# Altium PCB CY8C6347BZI-BLD54 PCB File.PcbDoc
Units mil, origin at the board's own origin, x right, y up, seen from the top; angles counter-clockwise.
Board outline 6000 x 4000 mil, 2 copper layers (Top Layer, Bottom Layer); 29 components, 27 nets, 191 pads, 0 vias.
Unrouted connection lines stored in the file: 82.
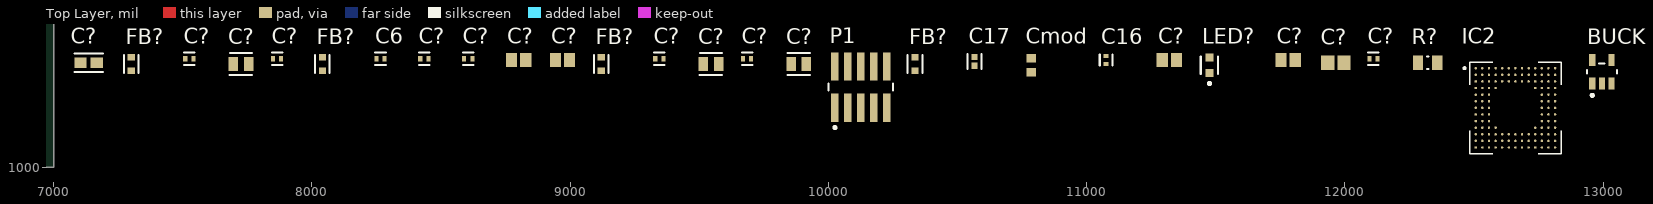
[diagram p0: Top Layer view]
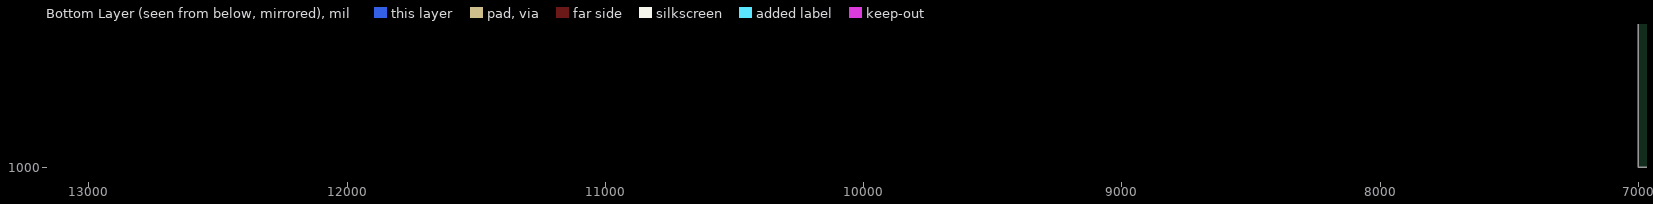
[diagram p1: Bottom Layer view, seen from below]

## Layer stack, top to bottom
Top Solder: solder mask 0.4, Solder Resist, Dk 3.5
Top Layer: signal copper 1.4
Dielectric 1: dielectric 12.6, FR-4, Dk 4.8
Bottom Layer: signal copper 1.4
Bottom Solder: solder mask 0.4, Solder Resist, Dk 3.5

## Board outline
1000,1000 7000,1000 7000,5000 1000,5000

## Design rules (kind name [scope] priority, off if disabled: settings)
Clearance [All] p1: gap=10 ignorepadtopadclearanceinfootprint=FALSE except(0: Arc-Hole Track-Hole SMDPad-Hole THPad-Hole Via-Hole Fill-Hole Poly-Hole Region-Hole Text-Hole)
PolygonConnect [All] p1: connectstyle=Relief reliefconductorwidth=10 reliefentries=4 polygonreliefangle="90 Angle" airgapwidth=10
RoomDefinition "PSoC6 Cardiac Arrest Schematic" [InComponentClass('PSoC6 Cardiac Arrest Schematic')] p1: confinementstyle=ConfineIn formatcopy=TRUE lockcomponents=FALSE outline 7050,1005 13235,1005 13235,1555 7050,1555
RoutingVias [All] p1: holewidth=28 width=50 viastyle="Through Hole" minholewidth=28 minwidth=50 maxholewidth=28 maxwidth=50
SolderMaskExpansion [All] p1: expansion=4 istentingtop=FALSE
Width [All] p1: maxlimit=10 minlimit=10 preferedwidth=10
30 further rules are at their usual default settings.

## Classes and differential pairs
component class "PSoC6 Cardiac Arrest Schematic": BUCK? C6 C16 C17 C? CinA CinB Cmod FB? IC2 L1 LED? P1 R? USB?

## Components (designator, comment, footprint, x,y, rotation, side; value= is the part's Value field where it differs from the comment)
BUCK? "LD3985M33R" FP-SOT23-5L-7049676-MFG 12995,1370 r90 top
C6 "GRM155R71C104KA88D" FP-GRM15-MFG 8265,1420 r0 top value=0.10μF
C16 "GRM155R71C104KA88D" FP-GRM15-MFG 11075,1415 r90 top value=0.10μF
C17 "GRM155R60J475ME47D" FP-GRM155-0_1-IPC_B 10565,1410 r90 top
C? "GRM155R71C104KA88D" FP-GRM15-MFG 12110,1420 r0 top value=0.10μF
C? "GRM188R60J106ME47D" FP-GRM188-0_1-e0_2_0_55-IPC_A 7135,1405 r0 top
C? "C0805C106K8PACTU" FP-C0805C-DG-MFG 7725,1400 r0 top value=10uF
C? "GRM155R71C104KA88D" FP-GRM15-MFG 7525,1420 r0 top value=0.10μF
C? "GRM155R71C104KA88D" FP-GRM15-MFG 9345,1420 r0 top value=0.10μF
C? "C0805C105K4PACTU" CAPC2013X145X50LL20T25 8970,1415 r0 top
C? "GRM155R71C104KA88D" FP-GRM15-MFG 8435,1420 r0 top value=0.10μF
C? "08052C103KAT2A" CAPC2013X140X50NL20T25 11965,1405 r0 top
C? "GRM155R71C104KA88D" FP-GRM15-MFG 8605,1420 r0 top value=0.10μF
C? "C0805C105K4PACTU" CAPC2013X145X50LL20T25 11320,1415 r0 top
C? "" FP-C0805C-DG-MFG 9545,1400 r0 top value=10uF
C? "" FP-C0805C-DG-MFG 9885,1400 r0 top value=10uF
C? "GRM155R71C104KA88D" FP-GRM15-MFG 7865,1420 r0 top value=0.10μF
C? "C0805C105K4PACTU" CAPC2013X145X50LL20T25 11780,1415 r0 top
C? "" FP-GRM15-MFG 9685,1420 r0 top value=0.10μF
C? "C0805C105K4PACTU" CAPC2013X145X50LL20T25 8800,1415 r0 top
Cmod "GRM188R71H222KA01D" CAPC1608X90X35NL10T15 10785,1395 r90 top
FB? "BLM18HE102SN1D" FP-BLM18-0_15-t0_8-MFG 7300,1400 r90 top
FB? "BLM18HE102SN1D" FP-BLM18-0_15-t0_8-MFG 8040,1400 r90 top
FB? "BLM18HE102SN1D" FP-BLM18-0_15-t0_8-MFG 10335,1400 r90 top
FB? "BLM18HE102SN1D" FP-BLM18-0_15-t0_8-MFG 9120,1400 r90 top
IC2 "CY8C6347BZI-BLD54" BGAS124C65P13X13_900X900X100 12660,1230 r0 top
LED? "LTST-C190GKT" FP-LTST-C190GKT-MFG 11475,1395 r90 top
P1 "FTSH-105-01-F-DV-K" SMTC-FTSH-105-01-L-DV-K_V 10125,1310 r0 top
R? "CRCW08052K00FKEA" FP-CRCW0805-e3-IPC_B 12320,1405 r0 top

## Footprints (in the part's own frame and the unit in brackets; to place one, negate y for a bottom-side part, rotate by r counter-clockwise, add the part's x,y. Pads: shape width x height; smd on the part's side, far side on the other; paste and mask are expansions set on the pad)
BGAS124C65P13X13_900X900X100 [mm]
  round 0.24 smd: A1(-3.9,3.9) A2(-3.25,3.9) A3(-2.6,3.9) A4(-1.95,3.9) A5(-1.3,3.9) A6(-0.65,3.9) A7(0,3.9) A8(0.65,3.9) A9(1.3,3.9) A10(1.95,3.9) A11(2.6,3.9) A12(3.25,3.9) A13(3.9,3.9) B1(-3.9,3.25) B2(-3.25,3.25) B3(-2.6,3.25) B4(-1.95,3.25) B5(-1.3,3.25) B6(-0.65,3.25) B7(0,3.25) B8(0.65,3.25) B9(1.3,3.25) B10(1.95,3.25) B11(2.6,3.25) B12(3.25,3.25) B13(3.9,3.25) C1(-3.9,2.6) C2(-3.25,2.6) C3(-2.6,2.6) C4(-1.95,2.6) C5(-1.3,2.6) C6(-0.65,2.6) C7(0,2.6) C8(0.65,2.6) C9(1.3,2.6) C10(1.95,2.6) C11(2.6,2.6) C12(3.25,2.6) C13(3.9,2.6) D1(-3.9,1.95) D2(-3.25,1.95) D3(-2.6,1.95) D4(-1.95,1.95) D10(1.95,1.95) D11(2.6,1.95) D12(3.25,1.95) D13(3.9,1.95) E1(-3.9,1.3) E2(-3.25,1.3) E3(-2.6,1.3) E11(2.6,1.3) E12(3.25,1.3) E13(3.9,1.3) F1(-3.9,0.65) F2(-3.25,0.65) F3(-2.6,0.65) F11(2.6,0.65) F12(3.25,0.65) F13(3.9,0.65) G1(-3.9,0) G2(-3.25,0) G3(-2.6,0) G11(2.6,0) G12(3.25,0) G13(3.9,0) H1(-3.9,-0.65) H2(-3.25,-0.65) H3(-2.6,-0.65) H11(2.6,-0.65) H12(3.25,-0.65) H13(3.9,-0.65) J1(-3.9,-1.3) J2(-3.25,-1.3) J3(-2.6,-1.3) J11(2.6,-1.3) J12(3.25,-1.3) J13(3.9,-1.3) K1(-3.9,-1.95) K2(-3.25,-1.95) K3(-2.6,-1.95) K4(-1.95,-1.95) K10(1.95,-1.95) K11(2.6,-1.95) K12(3.25,-1.95) K13(3.9,-1.95) L1(-3.9,-2.6) L2(-3.25,-2.6) L3(-2.6,-2.6) L4(-1.95,-2.6) L5(-1.3,-2.6) L6(-0.65,-2.6) L7(0,-2.6) L8(0.65,-2.6) L9(1.3,-2.6) L10(1.95,-2.6) L11(2.6,-2.6) L12(3.25,-2.6) L13(3.9,-2.6) M1(-3.9,-3.25) M2(-3.25,-3.25) M3(-2.6,-3.25) M4(-1.95,-3.25) M5(-1.3,-3.25) M6(-0.65,-3.25) M7(0,-3.25) M8(0.65,-3.25) M9(1.3,-3.25) M10(1.95,-3.25) M11(2.6,-3.25) M12(3.25,-3.25) M13(3.9,-3.25) N1(-3.9,-3.9) N2(-3.25,-3.9) N3(-2.6,-3.9) N4(-1.95,-3.9) N5(-1.3,-3.9) N6(-0.65,-3.9) N7(0,-3.9) N8(0.65,-3.9) N9(1.3,-3.9) N10(1.95,-3.9) N11(2.6,-3.9) N12(3.25,-3.9) N13(3.9,-3.9)
  silkscreen extent -5.1,-4.5 4.5,4.5
CAPC1608X90X35NL10T15 [mm] "Chip Capacitor, 2-Leads, Body 1.7x0.9mm, IPC Medium Density"
  rect 0.85x0.95 smd: 1(-0.675,0) 2(0.675,0)
  body extent -0.85,-0.45 0.85,0.45, height 0.9
CAPC2013X140X50NL20T25 [mm] "Chip Capacitor, 2-Leads, Body 2.00x1.25mm, IPC Medium Density"
  rect 1.3x1.45 smd: 1(-0.8,0) 2(0.8,0)
  body extent -1.1,-0.72 1.1,0.72, height 1.4
CAPC2013X145X50LL20T25 [mm] "Chip Capacitor, 2-Leads, Body 2.00x1.25mm, IPC High Density"
  rect 1.1x1.35 smd: 1(-0.7,0) 2(0.7,0)
  body extent -1.1,-0.72 1.1,0.72, height 1.45
FP-BLM18-0_15-t0_8-MFG [mm]
  rect 0.65x0.7 smd paste+0 mask+0: 1(-0.675,0) 2(0.675,0)
  silkscreen extent -0.87,-0.72 0.87,0.72, body extent -1.1,-0.58 1.1,0.58, height 0.25
FP-C0805C-DG-MFG [mm]
  rect 0.95x1.35 smd paste+0 mask+0: 1(-0.75,0) 2(0.75,0)
  silkscreen extent -1.11,-1.08 1.1,1.07, body extent -1.4,-0.85 1.4,0.85, height 0.25
FP-CRCW0805-e3-IPC_B [mil]
  rect 39.63x55.44 smd paste+0 mask+0: 1(-37.44,0) 2(37.44,0)
  silkscreen extent -3,-25 3,25, body extent -67,-38 67,38, height 10
FP-GRM15-MFG [mm]
  rect 0.4x0.5 smd paste+0 mask+0: 1(-0.4,0) 2(0.4,0)
  silkscreen extent -0.53,-0.63 0.53,0.63, body extent -0.7,-0.38 0.7,0.38, height 0.25
FP-GRM155-0_1-IPC_B [mil]
  rect 24.23x22.54 smd paste+0 mask+0: 1(-16.87,0) 2(16.87,0)
  silkscreen extent -29,-27 29,27, body extent -35,-17 35,17, height 10
FP-GRM188-0_1-e0_2_0_55-IPC_A [mil]
  rect 47.57x39.85 smd paste+0 mask+0: 1(-31.57,0) 2(31.57,0)
  silkscreen extent -55,-36 55,36, body extent -75,-40 75,40, height 10
FP-LTST-C190GKT-MFG [mm]
  rect 0.8x0.8 smd paste+0 mask+0: 1(-0.75,0) 2(0.75,0)
  silkscreen extent -1.92,-0.85 0.85,0.85, body extent -1.25,-0.55 1.25,0.55, height 0.25
FP-SOT23-5L-7049676-MFG [mm]
  rect 1.2x0.6 smd paste+0 mask+0: 1(-1.15,0.95) 2(-1.15,0) 3(-1.15,-0.95) 4(1.15,-0.95) 5(1.15,0.95)
  silkscreen extent -2.45,-1.48 0.8,1.47, body extent -1.85,-1.58 1.85,1.57, height 0.25
SMTC-FTSH-105-01-L-DV-K_V [mm] "CONN, 10-Leads, Body 6.35x3.43mm, Pitch 1.27mm"
  rect 0.74x2.79 smd: 1(-2.54,-2.035) 2(-2.54,2.035) 3(-1.27,-2.035) 4(-1.27,2.035) 5(0,-2.035) 6(0,2.035) 7(1.27,-2.035) 8(1.27,2.035) 9(2.54,-2.035) 10(2.54,2.035)
  silkscreen extent -3.17,-4.1 3.17,0.34, body extent -3.17,-2.92 3.18,2.92, height 6.12

## Part data
BUCK?: library part CMP-0244-00328-2, "IC REG LINEAR 3.3V 150MA SOT23-5", Case/Package=SOT-23, Dropout Voltage=60mV, Input Bias Current=85uA, Max Input Voltage=6V, Max Operating Temperature=125°C, Max Output Current=150mA, Min Current Limit=300mA, Min Input Voltage=2.5V, Min Operating Temperature=-40°C, Min Output Voltage=3.3V, Output Voltage Accuracy=2%, Package Quantity=1, Quiescent Current=150uA, Accuracy=2%, Height=1.3mm, Lead Free="Lead Free", Length=3mm, Mount="Surface Mount", Number of Outputs=1, Number of Pins=5, Number of Regulators=1, Output Current=150mA, Output Type=Fixed, Output Voltage=3.3V, Packaging="Tape and Reel", Polarity=Positive, Radiation Hardening=No, Width=1.75mm
C6 C16 C? C? C? C? C? C?: library part CMP-2100-03641-2, "CAP CER 0.1UF 16V X7R 0402", Capacitance=0.10μF, Manufacturer=Murata, Package=GRM15, Temperature="-55°C to +125°C", Temperature Characteristic=X7R, Temperature Range High=+125°C, Temperature Range Low=-55°C, Tolerance=10%, Voltage Rating=16Vdc, Category=Cap, ComponentLink2Description=Datasheet, ComponentLink2URL=https://search.murata.co.jp/Ceramy/image/img/A01X/G101/ENG/GRM155R71H471KA01-01A.pdf, Device Class L1="Passive Components", Device Class L2=Capacitors, Device Class L3="Ceramic Capacitors", Digikey Description="CAP CER 0.1UF 16V X7R 0402", Height=0.55mm, Ipc Land Pattern Name=CAPC10050X219, Lead Free=yes, Manufacturer Part Number=GRM155R71C104KA88D, Material=Ceramic, Mouser Description="0402 0.1 uF 16V ±10 % Tolerance X7R SMT Multilayer Ceramic Capacitor", Octopart=https://octopart.com/grm155r71c104ka88d-murata-196880, RoHS=TRUE, Standoff Height=0mm
C17: library part CMP-2008-04549-2, "Chip Multilayer Ceramic Capacitors for General Purpose, 0402, 4.7uF, X5R, 15%, 20%, 6.3V", Capacitance=4.7uF, Case Code (Imperial)=0402, Case Code (Metric)=1005, Dielectric=X5R, Max Operating Temperature=85°C, Min Operating Temperature=-55°C, Package Quantity=10000, Tolerance=20%, Voltage=6.3V, Case/Package=0402, Contact Plating=Tin, Depth=0.5mm, Height=0.5mm, Lead Free="Lead Free", Length=1mm, Mount="Surface Mount", Packaging="Tape and Reel", REACH SVHC="No SVHC", Termination=SMD/SMT, Thickness=0.022inch, Voltage Rating=6.3V, Voltage Rating (DC)=6.3V, Weight=0.000212oz, Width=0.02inch
C?: library part CMP-2006-02792-2, "Chip Multilayer Ceramic Capacitors for General Purpose, 0603, 10uF, X5R, 15%, 20%, 6.3V", Capacitance=10uF, Case Code (Imperial)=0603, Case Code (Metric)=1608, Dielectric=X5R, Max Operating Temperature=85°C, Min Operating Temperature=-55°C, Package Quantity=4000, Tolerance=20%, Voltage=6.3V, Case/Package=0603, Depth=0.8mm, Height=0.8mm, Lead Free="Lead Free", Length=1.6mm, Material=Ceramic, Mount="Surface Mount", Packaging="Tape and Reel", Radiation Hardening=No, REACH SVHC="No SVHC", Termination=SMD/SMT, Thickness=0.035inch, Voltage Rating=6.3V, Voltage Rating (DC)=6.3V, Width=0.031inch
C?: library part CMP-2007-03243-2, "CAP CER 10UF 10V X5R 0805", 3DS Part Number=220-00001, Capacitance=10uF, Manufacturer=Kemet, Package=C0805C-DG, Temperature="-55°C to +85°C", Temperature Characteristic=X5R, Temperature Coefficient=15%, Temperature Range High=+85°C, Temperature Range Low=-55°C, Tolerance=10%, Voltage=10V, Automotive=No, Category=Cap, ComponentLink2Description=Datasheet, ComponentLink2URL=https://content.kemet.com/datasheets/KEM_C1006_X5R_SMD.pdf, Device Class L1="Passive Components", Device Class L2=Capacitors, Device Class L3="Ceramic Capacitors", Digikey Description="CAP CER 10UF 10V X5R 0805", Height=1.4mm, Ipc Land Pattern Name=CAPC200125X125, Lead Free=Yes, Manufacturer Part Number=C0805C106K8PACTU, Material=Ceramic, Mouser Description="CAP CER 10UF 10V X5R 0805", Octopart=https://octopart.com/c0805c106k8pactu-kemet-98697, RoHS=TRUE, Voltage Rating=10V
C? C? C? C?: library part CMP-1036-04746-2, Manufacturer=Kemet, Part Number=C0805C105K4PACTU
C?: library part CMP-2007-04596-1, Manufacturer="AVX Interconnect / Elco", Part Number=08052C103KAT2A
C? C?: library part CMP-2007-03243-2, "CAP CER 10UF 10V X5R 0805", 3DS Part Number=220-00001, Capacitance=10uF, Manufacturer=Kemet, Manufacturer Part Number=C0805C106K8PACTU, Package=C0805C-DG, Temperature="-55°C to +85°C", Temperature Characteristic=X5R, Temperature Coefficient=15%, Temperature Range High=+85°C, Temperature Range Low=-55°C, Tolerance=10%, Voltage=10V, Automotive=No, Category=Cap, ComponentLink2Description=Datasheet, ComponentLink2URL=https://content.kemet.com/datasheets/KEM_C1006_X5R_SMD.pdf, Device Class L1="Passive Components", Device Class L2=Capacitors, Device Class L3="Ceramic Capacitors", Digikey Description="CAP CER 10UF 10V X5R 0805", Height=1.4mm, Ipc Land Pattern Name=CAPC200125X125, Lead Free=Yes, Material=Ceramic, Mouser Description="CAP CER 10UF 10V X5R 0805", Octopart=https://octopart.com/c0805c106k8pactu-kemet-98697, RoHS=TRUE, Voltage Rating=10V
C?: library part CMP-2100-03641-2, "CAP CER 0.1UF 16V X7R 0402", Capacitance=0.10μF, Manufacturer=Murata, Manufacturer Part Number=GRM155R71C104KA88D, Package=GRM15, Temperature="-55°C to +125°C", Temperature Characteristic=X7R, Temperature Range High=+125°C, Temperature Range Low=-55°C, Tolerance=10%, Voltage Rating=16Vdc, Category=Cap, ComponentLink2Description=Datasheet, ComponentLink2URL=https://search.murata.co.jp/Ceramy/image/img/A01X/G101/ENG/GRM155R71H471KA01-01A.pdf, Device Class L1="Passive Components", Device Class L2=Capacitors, Device Class L3="Ceramic Capacitors", Digikey Description="CAP CER 0.1UF 16V X7R 0402", Height=0.55mm, Ipc Land Pattern Name=CAPC10050X219, Lead Free=yes, Material=Ceramic, Mouser Description="0402 0.1 uF 16V ±10 % Tolerance X7R SMT Multilayer Ceramic Capacitor", Octopart=https://octopart.com/grm155r71c104ka88d-murata-196880, RoHS=TRUE, Standoff Height=0mm
Cmod: library part CMP-2006-02908-5, "Chip Capacitor, 2.2 nF, +/- 10%, 50 V, -55 to 125 degC, 0603 (1608 Metric), RoHS, Tape and Reel", Manufacturer=Murata, Max Operating Temperature="125 degC", Min Operating Temperature="-55 degC", Package Quantity=4000, Voltage Rating="50 V", ComponentLink1Description="Manufacturer URL", ComponentLink1URL=http://www.murata.com/, ComponentLink2Description=Datasheet, ComponentLink2URL=http://search.murata.co.jp/Ceramy/image/img/A01X/G101/ENG/GRM188R71H222KA01-01.pdf, DatasheetVersion=02/2016, Height="0.8 mm", Lead Pitch="4 mm", Length="1.6 mm", Mount="Surface Mount", Mounting Technology="Surface Mount", PackageDescription="2-Pin Surface Mount Device, Body 1.6 x 0.8 mm", PackageReference=0603, Packaging="Tape and Reel", Pins=2, REACH SVHC="No SVHC", RoHSCompliant=true
FB? FB? FB? FB?: library part CMP-0686-00363-3, "Chip Ferrite Bead, 0603, 1000Ω @ 100MHz, 0.35Ω, 25%, 600mA", Case Code (Imperial)=0603, Case Code (Metric)=1608, Current Rating=600mA, DC Resistance (DCR)=350mR, Max Operating Temperature=125°C, Min Operating Temperature=-55°C, Package Quantity=1, Test Frequency=100MHz, Tolerance=25%, Case/Package=0603, Core Material=Ferrite, DC Current=600mA, Depth=0.8mm, Height=0.8mm, Impedance=1kR, Lead Free="Lead Free", Length=1.6mm, Material=Steel, Max Current Rating=600mA, Max DC Current=600mA, Military Standard=Not, Number of Circuits=1, Number of Lines=1, Number of Pins=2, Packaging="Tape and Reel", Radiation Hardening=No, REACH SVHC="No SVHC", Termination=SMD/SMT, Width=0.8mm
IC2: "Integrated Circuit", Manufacturer_Name="Cypress Semiconductor", Mouser Part Number=727-CY8C6347BZIBLD54, Arrow Part Number=CY8C6347BZI-BLD54, Arrow Price/Stock=https://www.arrow.com/en/products/cy8c6347bzi-bld54/cypress-semiconductor, Datasheet Link=https://www.arrow.com/en/products/cy8c6347bzi-bld54/cypress-semiconductor, Height=1mm, Manufacturer_Part_Number=CY8C6347BZI-BLD54, Mouser Price/Stock=https://www.mouser.co.uk/ProductDetail/Cypress-Semiconductor/CY8C6347BZI-BLD54/?qs=XeJtXLiO41TbiRPpjrRqiA%3D%3D
LED?: library part CMP-22017-000005-2, "LED GREEN CLEAR CHIP SMD", Case Code (Imperial)=0603, Case Code (Metric)=1608, Color=Green, Forward Current=30mA, Forward Voltage=2.1V, Lens Color=Colorless, Max Operating Temperature=85°C, Min Operating Temperature=-55°C, Package Quantity=1, Power Dissipation=100mW, Reverse Voltage=5V, Test Current=10mA, Voltage=2V, Case/Package=0603, Depth=0.8mm, Dominant Wavelength=569nm, Height=0.8mm, Illumination Color=Green, Lead Free="Lead Free", Length=1.6mm, Lens Style=Clear, Lens Transparency=Clear, Luminous Intensity=6mcd, Mount="Surface Mount", Number of Elements=1, Number of LEDs=1, Number of Pins=2, Packaging="Tape and Reel", Power Rating=100mW, Radiation Hardening=No, Viewing Angle=130°, Wavelength=565nm, Width=0.8mm
P1: library part CMP-2000-05352-1, "Male Header, Pitch 1.27 mm, 2 x 5 Position, Height 6.12 mm, RoHS, Tube", Color=Black, Manufacturer=Samtec, Package Description="Male Header, Pitch 1.27 mm, 2 x 5 Position, Height 5.97 mm, Tail Length 4.32 mm", Package Reference=FTSH-105-01-L-DV-K, Category=Connectors,Interconnects, Connector Type=Header,Shrouded, Contact Finish=Gold, Contact Finish Thickness=3µin(0.08µm), Contact Mating Length="0.120\"(3.05mm)", Contact Type=MalePin, Datasheet URL=http://suddendocs.samtec.com/prints/ftsh-1xx-xx-xxx-dv-xxx-mkt.pdf, Datasheet Version="Rev. ET, 10/1995", Family=RectangularConnectors-Headers,MalePins, Fastening Type=-, Features=-, Manufacturer URL=http://www.samtec.com/, Mounting Type=SurfaceMount, Number of Positions=10, Number of Positions Loaded=All, Number of Rows=2, Package URL=http://suddendocs.samtec.com/prints/ftsh-1xx-xx-xxx-dv-xxx-footprint.pdf, Packaging=Tube, Pitch="0.050\"(1.27mm)", Row Spacing="0.050\"(1.27mm)", Series=FTSH, Termination=Solder
R?: library part CMP-2001-03755-2, "RES Thick Film, 2kΩ, 1%, 0.125W, 100ppm/°C, 0805", Case Code (Imperial)=0805, Case Code (Metric)=2012, Max Operating Temperature=155°C, Max Power Dissipation=125mW, Min Operating Temperature=-55°C, Package Quantity=10, Resistance=2kR, Temperature Coefficient=100ppm/°C, Tolerance=1%, Voltage Rating=150V, Case/Package=0805, Composition="Thick Film", Contact Plating=Tin, Depth=1.25mm, Features="Automotive AEC-Q200", Height=0.02inch, Lead Free="Lead Free", Length=2mm, Military Standard=Not, Mount="Surface Mount", Number of Pins=2, Number of Terminals=2, Number of Terminations=2, Packaging="Tape and Reel", Power Rating=125mW, Radiation Hardening=No, Termination=SMD/SMT, Voltage Rating (DC)=150V, Weight=0.000194oz, Width=1.25mm, Working Voltage=150V

## Nets (pads, with @x,y where several pads share a name; then routed paths per layer and width w, separated by ;. In a path a pad name is that pad's centre, name@x,y a point inside that pad or via, vN(x,y) a via of type N, cw(c..) or ccw(c..) an arc to the next point about the centre after c; other vN are vias at no path point)
DVDD: IC2.F2 IC2.G3
GND: C6.1 C16.2 C17.1 C?.1@7509.25,1420 C?.1@8419.25,1420 C?.1@8589.25,1420 C?.1@8772.44,1415 C?.1@8942.44,1415 C?.1@9329.25,1420 C?.1@9669.25,1420 C?.2@7166.57,1405 C?.2@7754.53,1400 C?.2@7880.75,1420 C?.2@9574.53,1400 C?.2@9914.53,1400 Cmod.2 IC2.A1 IC2.B1 IC2.B2 IC2.C3 IC2.C11 IC2.D1 IC2.D4 IC2.D10 IC2.E3 IC2.G2 IC2.K4 IC2.K10 IC2.M12 P1.3 P1.5 P1.6 P1.7 P1.8 P1.9
NetBUCK?_2: BUCK?.2 C?.1@11292.44,1415 C?.1@11752.44,1415 C?.1@11933.5,1405 LED?.1
NetBUCK?_3: BUCK?.3 C?.2@12125.75,1420
NetBUCK?_4: BUCK?.4 C?.2@11996.5,1405
NetC6_2: C6.2 IC2.N12
NetC16_1: C16.1 IC2.B5
NetC17_2: C17.2 IC2.C4
NetCinA_1: IC2.M3
NetCinB_1: IC2.N4
NetCmod_1: Cmod.1 IC2.L5
NetIC2_A3: IC2.A3
NetIC2_B3: IC2.B3
NetIC2_B4: IC2.B4
NetIC2_M1: IC2.M1 P1.2
NetIC2_N2: IC2.N2 P1.4
NetLED?_2: LED?.2 R?.1
RST: IC2.A8 P1.10
RX: IC2.A9
TX: IC2.C8
VCC: BUCK?.5 C?.2@8620.75,1420 C?.2@8997.56,1415 C?.2@11347.56,1415 FB?.1@8040,1373.43 FB?.1@10335,1373.43 FB?.2@9120,1426.57 IC2.A2 P1.1 R?.2
VCC_FB3: C?.1@9855.47,1400 C?.2@8450.75,1420 C?.2@8827.56,1415 C?.2@9700.75,1420 FB?.1@9120,1373.43 IC2.A10 IC2.A13 IC2.D11 IC2.M4
VDD: BUCK?.1 C?.2@11807.56,1415
VDD_NS: C?.1@7695.47,1400 C?.2@7540.75,1420 FB?.2@8040,1426.57 IC2.A5
VDDA: C?.1@9515.47,1400 C?.2@9360.75,1420 FB?.2@10335,1426.57 IC2.M13 IC2.N13
VDDR: C?.1@7849.25,1420 C?.1@12094.25,1420 FB?.1@7300,1373.43 IC2.C2 IC2.D2 IC2.E2
VRef: C?.1@7103.43,1405 FB?.2@7300,1426.57 IC2.A4 IC2.F3
pads on no net: IC2.A6 IC2.A7 IC2.A11 IC2.A12 IC2.B6 IC2.B7 IC2.B8 IC2.B9 IC2.B10 IC2.B11 IC2.B12 IC2.B13 IC2.C1 IC2.C5 IC2.C6 IC2.C7 IC2.C9 IC2.C10 IC2.C12 IC2.C13 IC2.D3 IC2.D12 IC2.D13 IC2.E1 IC2.E11 IC2.E12 IC2.E13 IC2.F1 IC2.F11 IC2.F12 IC2.F13 IC2.G1 IC2.G11 IC2.G12 IC2.G13 IC2.H1 IC2.H2 IC2.H3 IC2.H11 IC2.H12 IC2.H13 IC2.J1 IC2.J2 IC2.J3 IC2.J11 IC2.J12 IC2.J13 IC2.K1 IC2.K2 IC2.K3 IC2.K11 IC2.K12 IC2.K13 IC2.L1 IC2.L2 IC2.L3 IC2.L4 IC2.L6 IC2.L7 IC2.L8 IC2.L9 IC2.L10 IC2.L11 IC2.L12 IC2.L13 IC2.M2 IC2.M5 IC2.M6 IC2.M7 IC2.M8 IC2.M9 IC2.M10 IC2.M11 IC2.N1 IC2.N3 IC2.N5 IC2.N6 IC2.N7 IC2.N8 IC2.N9 IC2.N10 IC2.N11